# Altium PCB PCB.PcbDoc
Units mm, origin at the board's own origin, x right, y up, seen from the top; angles counter-clockwise.
Board outline 21 x 24 mm, 2 copper layers (Top Layer, Bottom Layer), stack 0.96 mm thick; 11 components, 7 nets, 26 pads, 24 vias.
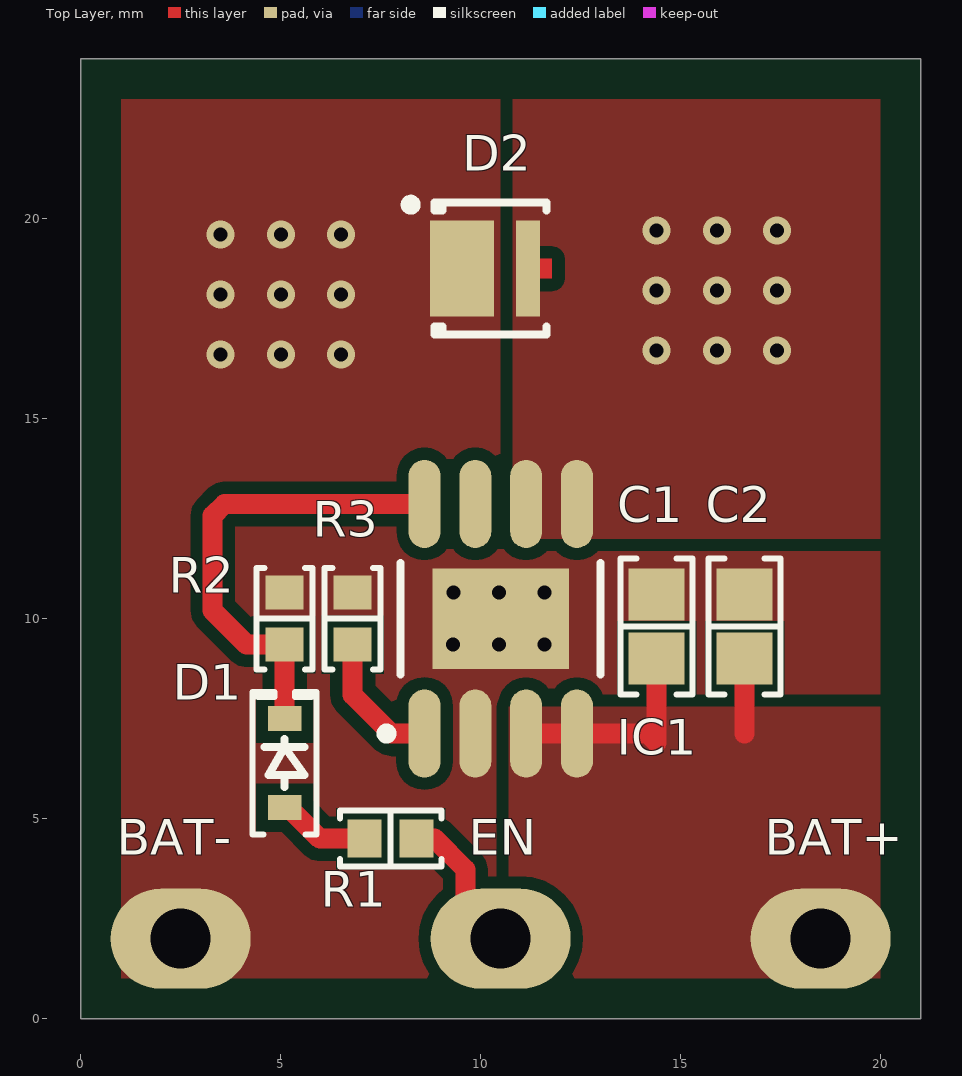
[diagram p0: Top Layer view]
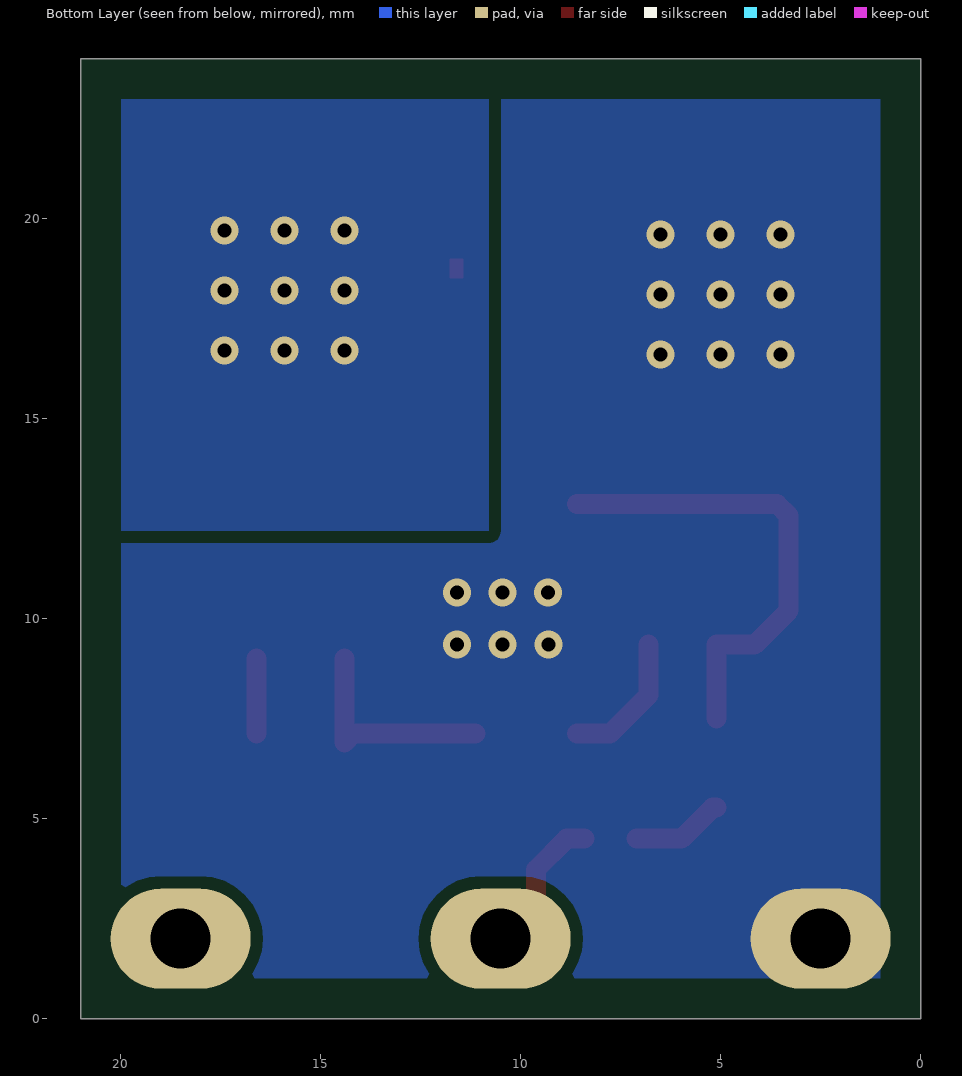
[diagram p1: Bottom Layer view, seen from below]
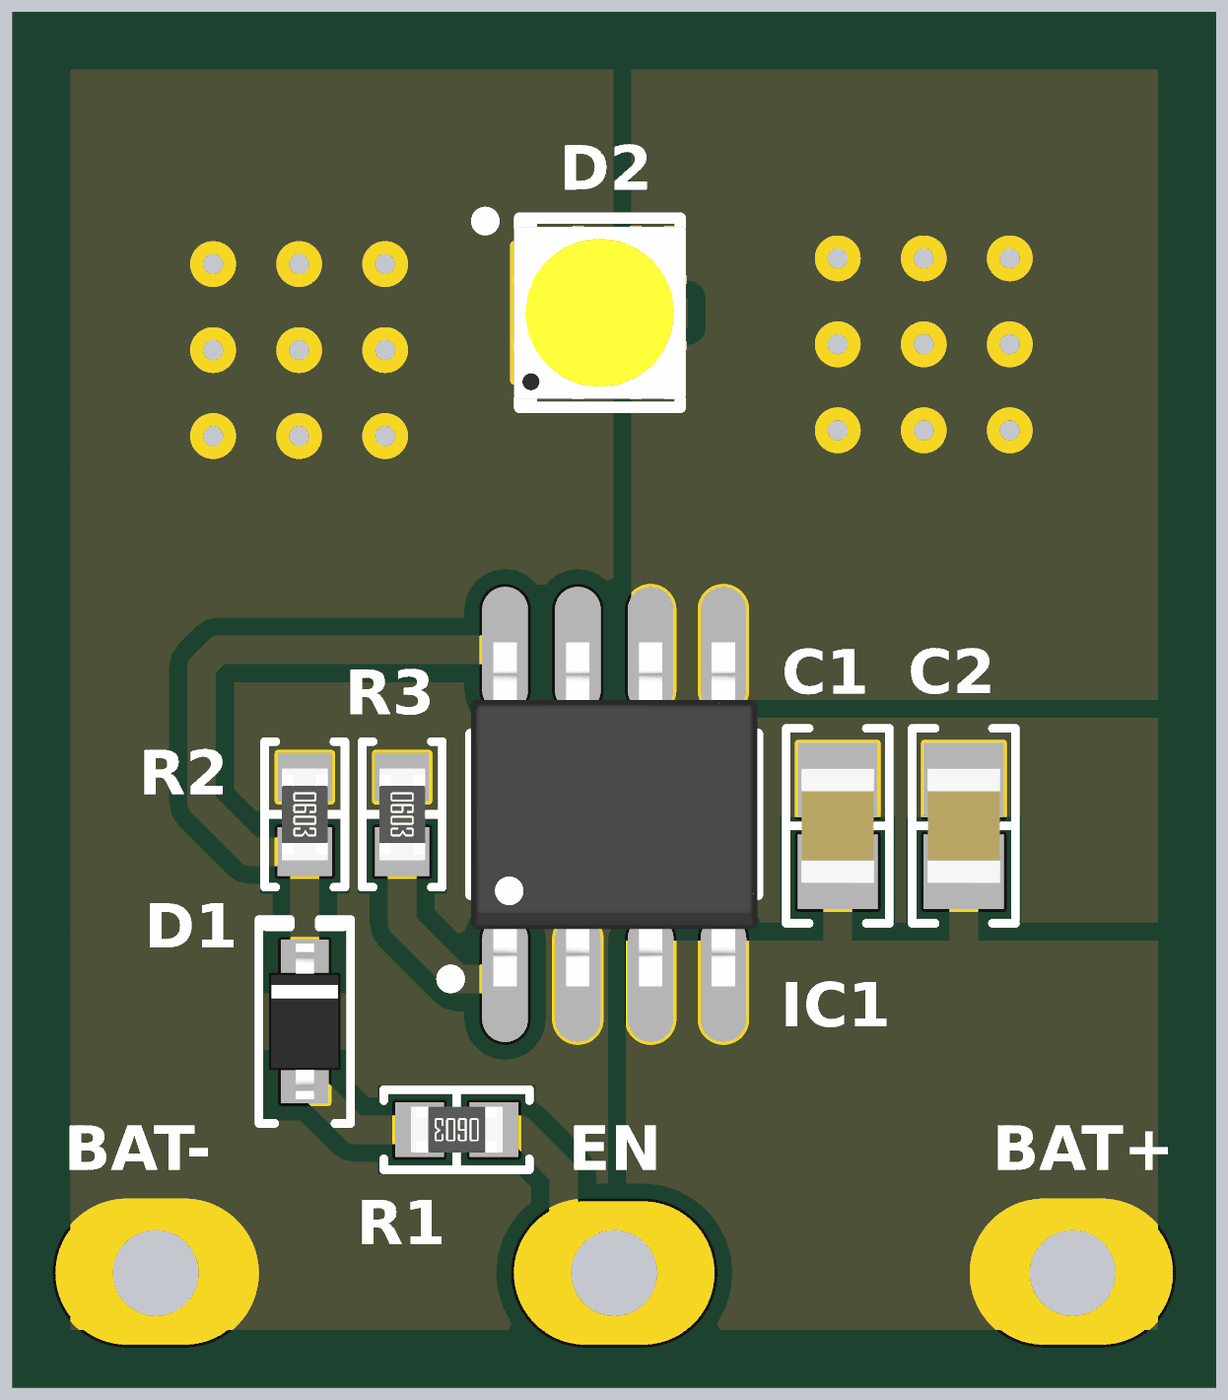
[diagram p2: 3D render of the assembled board from above, using the file's embedded part models]

## Layer stack, top to bottom
Top Solder: solder mask 0.02, Solder Resist, Dk 3.5
Top Layer: signal copper 0.03
Dielectric 1: dielectric 0.9, FR-4, Dk 4.8
Bottom Layer: signal copper 0.03
Bottom Solder: solder mask 0.02, Solder Resist, Dk 3.5

## Board outline
0,0 0,24 21,24 21,0

## Design rules (kind name [scope] priority, off if disabled: settings)
AcuteAngle [All] p1: minimum=6.00000000000000E+0001 checktracksonly=TRUE
AssemblyTestPointUsage [(not InNetClass('NOTESTPOINTS'))] p1: allowmultiple=TRUE
AssemblyTestPointUsage AssemblyTestPointUsageN [InNetClass('NOTESTPOINTS')] p2: valid=2 allowmultiple=TRUE
AssemblyTestpoint [All] p1: testpointundercomponent=TRUE minsize=0.8 maxsize=2 preferedsize=1 minholesize=0 maxholesize=0.35 preferedholesize=0 testpointgrid=1.27 usegrid=FALSE gridoriginx=87.5 gridoriginy=62.5 gridtolerance=0 allowsidetop=TRUE minspacing=2.54 // Zollner
BoardOutlineClearance BoardCopperOutlineClearance [(OnLayer('Top Layer') OR OnLayer('Bottom Layer') )] p1: gap=0.5 ignorepadtopadclearanceinfootprint=FALSE except(1: Poly-OutlineEdge Region-OutlineEdge; 1.5: SMDPad-OutlineEdge THPad-OutlineEdge)
Clearance PadToViaClearance [IsVia and not IsComponentVia vs IsPad] p1: gap=0.025 ignorepadtopadclearanceinfootprint=TRUE
Clearance "Clearance NOTSELV-SELV" [InNetClass('NOTSELV') vs NOT InNetClass('NOTSELV')] p2: gap=6 ignorepadtopadclearanceinfootprint=FALSE // according to previous calio PCB
Clearance "Clearance (FAB)" [All] p3: gap=0.203 ignorepadtopadclearanceinfootprint=TRUE except(0.305: Arc-Poly Track-Poly SMDPad-Poly THPad-Poly Via-Poly Fill-Poly Poly-Poly)
ComponentClearance ComponentClearance_NetTie [((ObjectKind = 'Component') And (ComponentType = 'Net Tie')) Or (Footprint = 'StarPoint') Or (Footprint like 'NetTieVia*')] p1: gap=-3.81 collisioncheckmode=3 verticalgap=-3.81 showdistances=FALSE
ComponentClearance [All] p2: gap=0.254 collisioncheckmode=3 verticalgap=0.254 showdistances=FALSE
DiffPairsRouting [All] p1: maxlimit=1.27 minlimit=0.203 mostfreqgap=0.203 toplayer_minwidth=0.152 toplayer_maxwidth=2.54 toplayer_prefwidth=0.254 bottomlayer_minwidth=0.152 bottomlayer_maxwidth=2.54 bottomlayer_prefwidth=0.254 maxuncoupledlength=12.7
FabricationTestPointUsage [All] p1: valid=2 allowmultiple=FALSE
FabricationTestpoint [All] p1: side=3 testpointundercomponent=TRUE minsize=1.016 maxsize=2.54 preferedsize=1.524 minholesize=0 maxholesize=1.016 preferedholesize=0.813 testpointgrid=0.025 allowsidetop=TRUE allowsidebottom=TRUE usegrid=FALSE gridtolerance=0
HoleSize [All] p1: absolutevalues=TRUE maxlimit=6.35 minlimit=0.3 maxpercent=80.000 minpercent=20.000 // Zollner
HoleToHoleClearance HoleToHoleClearance_NetTieVia [InPadClass('NetTieVias') vs InPadClass('NetTieVias')] p1: gap=0 allowstackedmicrovias=TRUE
HoleToHoleClearance [All] p2: gap=0.25 allowstackedmicrovias=TRUE // Zollner
MinimumAnnularRing [All] p1: minimumring=0.15 // PCBWAY
MinimumSolderMaskSliver [All] p1: minsoldermaskwidth=0.2 // Zollner
PlaneClearance PlaneClearance_1 [All] p1: clearance=0.508
PlaneConnect [All] p1: pad.planeconnectstyle=Relief pad.reliefexpansion=0.508 pad.reliefentries=4 pad.reliefconductorwidth=0.254 pad.reliefairgap=0.254 via.planeconnectstyle=Direct via.reliefexpansion=0.508 via.reliefentries=4 via.reliefconductorwidth=0.254 via.reliefairgap=0.254
PolygonConnect [All] p1: connectstyle=Direct reliefconductorwidth=0.254 reliefentries=4 polygonreliefangle="90 Angle" airgapwidth=0.254
RoutingVias [All] p1: holewidth=0.35 width=0.7 viastyle="Through Hole" minholewidth=0.3 minwidth=0.6 maxholewidth=1.27 maxwidth=1.27
SMDEntry [not IsTestpoint] p1: side=TRUE corner=TRUE anyangle=FALSE
SMDNeckDown [not IsTestpoint] p1: percent=90.000
SMDToCorner [All] p1: distance=10000
SMDToPlane [All] p1: distance=0
ShortCircuit [All vs not IsBoardCutoutRegion] p1: allowed=FALSE
SilkToSolderMaskClearance [IsPad] p1: minsilkscreentomaskgap=0.127 clearancetoexposedcopper=TRUE
SolderMaskExpansion [All] p1: expansion=0.05 // Zollner
SolderMaskExpansion SolderMaskExpansionToHoles [All] p2: expansion=0.1 soldermaskfromhole=TRUE // Zollner
UnRoutedNet [All] p1: checkbadconnections=TRUE
ViasUnderSMD HeatSinkVia [not InComponentClass('Heat Sink')] p1: allowed=FALSE
Width [All] p1: maxlimit=12.7 minlimit=0.203 preferedwidth=0.254
16 further rules are at their usual default settings.

## Classes and differential pairs
component class "Heat Sink": IC1

## Components (designator, comment, footprint, x,y, rotation, side; value= is the part's Value field where it differs from the comment)
BAT+ "2.5MMx3.5MM" PAD_WITH_HOLE_2.5X3.5MM 18.5,2 r90 top locked (schematic designator J1)
BAT- "2.5MMx3.5MM" PAD_WITH_HOLE_2.5X3.5MM 2.5,2 r90 top locked (schematic designator J3)
C1 "10µF" "CAP 0805_2012" 14.4,9.8 r270 top
C2 "10µF" "CAP 0805_2012" 16.6,9.8 r270 top
D1 "1N4148WS-HG3-08" SOD323 5.1,6.388 r90 top
D2 "MP-3030-1100-56-95" "LUMINUS MP-3030-110" 10.25,18.75 r0 top
EN "2.5MMx3.5MM" PAD_WITH_HOLE_2.5X3.5MM 10.5,2 r90 top locked (schematic designator J2)
IC1 "CN5711" "ALPHAOMEGA SO8 SOP-8L" 10.5,10 r90 top
R1 "5.1 kOhms" "RES 0603_1608" 7.75,4.5 r180 top
R2 "20 kOhms" "RES 0603_1608" 5.1,10 r270 top
R3 "9.1 kOhms" "RES 0603_1608" 6.8,10 r270 top

## Footprints (in the part's own frame and the unit in brackets; to place one, negate y for a bottom-side part, rotate by r counter-clockwise, add the part's x,y. Pads: shape width x height; smd on the part's side, far side on the other; paste and mask are expansions set on the pad)
"ALPHAOMEGA SO8 SOP-8L" [mm] "SOIC, 8-Leads, Body 4.90x3.90mm, Pitch 1.27mm, IPC Medium Density"
  oval 2.2x0.8 smd: 1(-2.87,1.905) 2(-2.87,0.635) 3(-2.87,-0.635) 4(-2.87,-1.905) 5(2.87,-1.905) 6(2.87,-0.635) 7(2.87,0.635) 8(2.87,1.905)
  rect 2.513x3.402 smd: 6(0,0)
  silkscreen extent -2.99,-2.5 1.4,2.98, body extent -3,-2.5 3,2.5, height 1.75
"CAP 0805_2012" [mm] "Chip Capacitor, 2-Leads, Body 2.00x1.20mm, IPC Medium Density"
  rect 1.3x1.4 smd: 1(-0.8,0) 2(0.8,0)
  silkscreen extent -1.7,-0.9 1.7,0.9, body extent -1,-0.64 1,0.64, height 1.26
"LUMINUS MP-3030-110" [mm]
  rect 0.6x2.4 smd paste-0.2: 1(0.935,0)
  rect 1.6x2.4 smd paste-0.25: 2(-0.715,0)
  Top Layer region: 1.185,-0.25 1.535,-0.25 1.535,0.25 1.185,0.25
  silkscreen extent -2.12,-1.65 1.4,1.72, body extent -1.51,-1.51 1.51,1.51, height 0.53
PAD_WITH_HOLE_2.5X3.5MM [mm]
  rrect100% 2.5x3.5 hole 1.5: 1(0,0)
"RES 0603_1608" [mm] "Chip Resistor, 2-Leads, Body 1.60x0.80mm, IPC Medium Density"
  rect 0.85x0.95 smd: 1(-0.65,0) 2(0.65,0)
  silkscreen extent -1.27,-0.7 1.27,0.7, body extent -0.8,-0.4 0.8,0.4, height 0.45
SOD323 [mm] "SOD, 2-Leads, Body 1.25x2.50mm, IPC Medium Density"
  rect 0.625x0.83 smd: 1(-1.112,0) 2(1.112,0)
  silkscreen extent -1.78,-0.8 1.78,0.8, body extent -1.36,-0.62 1.36,0.62, height 1.05

## Part data
BAT+ BAT- EN: library part PAD_WITH_HOLE_2.5X3.5MM, "High: 3mm Length: 3.5mm"
C1 C2: library part 08056D106KAT2A, "CAP CER 10UF 6.3V X5R 0805", Device Package="0805 (2012 Metric)", manufacturer="AVX Corporation", Operating Temperature="-55°C ~ 85°C", Supplier Part Number 1=478-1417-1-ND, Temperature Coefficient=X5R, Tolerance=±10%, Voltage - Rated=6.3V, Applications="General Purpose", Capacitance=10µF, componentlink1description=Datasheet, componentlink1url=http://datasheets.avx.com/cx5r.pdf, componentlink2description="DigiKey Link", componentlink2url=http://digikey.com/product-detail/en/avx-corporation/08056D106KAT2A/478-1417-1-ND/564449, id=127, lastupdated=2020-09-02T01:04:40.460, Lifecycle Status=Active, Minimum Order=1, Mounting Type="Surface Mount, MLCC", Package / Case="0805 (2012 Metric)", packaging=TapeAndReel, partid=3135, Part Number=08056D106KAT2A, Part Status=Active, price=0.04, series=-, Size / Dimension="0.079\" L x 0.049\" W (2.01mm x 1.25mm)", Supplier 1=DigiKey, Thickness (Max)="0.055\" (1.40mm)"
D1: "SWITCHING DIODE GENPURP SOD323-H", Current - Average Rectified (Io)=150mA, Current - Reverse Leakage @ Vr="100µA @ 100V", manufacturer="Vishay Semiconductor Diodes Division", Operating Temperature - Junction="-55°C ~ 150°C", Package / Case="SC-76, SOD-323", Supplier Device Package=SOD-323, Supplier Part Number 1=1N4148WS-HG3-08GICT-ND, Voltage - DC Reverse (Vr) (Max)=100V, Voltage - Forward (Vf) (Max) @ If="1.2V @ 100mA", componentlink1description=Datasheet, componentlink1url=http://www.vishay.com/docs/85413/1n4148wsg.pdf, componentlink2description="DigiKey Link", componentlink2url=http://digikey.com/product-detail/en/vishay-semiconductor-diodes-division/1N4148WS-HG3-08/1N4148WS-HG3-08GICT-ND/9467498, Diode Type=Standard, id=2893, lastupdated=2023-01-02T21:07:51.313, Lifecycle Status=Active, Minimum Order=1, Mounting Type="Surface Mount", packaging=TapeAndReel, partid=2893, Part Number=1N4148WS-HG3-08, Part Status=Active, price=0.06, Reverse Recovery Time (Trr)=4ns, series="Automotive, AEC-Q101", Speed="Small Signal =< 200mA (Io), Any Speed", Supplier 1=DigiKey
D2: "LED MID PWR 5600K 95CRI 3030", Color="White, Cool", Cri (Color Rendering Index)=95, Current - Max=240mA, Current - Test=150mA, Device Package="1212 (3030 Metric)", Flux @ 25°C, Current - Test="60lm (Typ)", Lumens/Watt @ Current - Test="133 lm/W", manufacturer="Luminus Devices Inc.", Supplier Device Package=3030, Supplier Part Number 1=1214-1348-1-ND, Voltage - Forward (Vf) (Typ)=3V, Cct (K)=5600K, componentlink1description=Datasheet, componentlink1url=https://download.luminus.com/datasheets/Luminus_MP3030_1100_Datasheet.pdf, componentlink2description="DigiKey Link", componentlink2url=https://www.digikey.com/en/products/detail/luminus-devices-inc/MP-3030-1100-56-95/5731697, Height - Seated (Max)="0.020\" (0.52mm)", id=1, lastupdated=2023-01-02T21:00:00.490, Lifecycle Status=Active, Minimum Order=1, Mounting Type="Surface Mount", Package / Case="1212 (3030 Metric)", packaging=TapeAndReel, partid=1, Part Number=MP-3030-1100-56-95, Part Status=Active, price=0.05, series=MP-3030, Size / Dimension="0.118\" L x 0.118\" W (3.00mm x 3.00mm)", Supplier 1=DigiKey, Viewing Angle=110°
IC1: library part "IC CN5711 8SOP", "Current regulation integrated circuit / operating from an input voltage of 2.8V to 6V, the / constant output current can be set up to 1.5A"
R1: library part TNPW06035K10BYEN, "RES 5.1K OHM 0.1% 1/10W 0603", Device Package="0603 (1608 Metric)", manufacturer="Vishay Dale", Operating Temperature="-55°C ~ 155°C", Power (Watts)="0.125W, 1/8W", Ratings=AEC-Q200, Supplier Device Package=0603, Supplier Part Number 1=541-9831-1-ND, Temperature Coefficient=±10ppm/°C, Tolerance=±0.1%, componentlink1description=Datasheet, componentlink1url=http://www.vishay.com/docs/28758/tnpw_e3.pdf, componentlink2description="DigiKey Link", componentlink2url=http://digikey.com/product-detail/en/vishay-dale/TNPW06035K10BYEN/541-9831-1-ND/9562456, Composition="Thin Film", Features="Anti-Sulfur, Automotive AEC-Q200, Moisture Resistant", Height - Seated (Max)="0.022\" (0.55mm)", id=199, lastupdated=2023-01-02T20:30:25.390, Lifecycle Status=Active, Minimum Order=1, Number of Terminations=2, Package / Case="0603 (1608 Metric)", packaging=TapeAndReel, partid=5273, Part Number=TNPW06035K10BYEN, Part Status=Active, price=0.27, Resistance="5.1 kOhms", series="TNPW e3", Size / Dimension="0.061\" L x 0.033\" W (1.55mm x 0.85mm)", Supplier 1=DigiKey
R2: library part TNPW060320K0FHEA, "RES 20K OHM 1% 1/10W 0603", Device Package="0603 (1608 Metric)", manufacturer="Vishay Dale", Operating Temperature="-55°C ~ 155°C", Power (Watts)="0.1W, 1/10W", Ratings=AEC-Q200, Supplier Device Package=0603, Supplier Part Number 1=TNPW060320K0FHEA-ND, Temperature Coefficient=±50ppm/°C, Tolerance=±1%, componentlink1description=Datasheet, componentlink1url=https://www.vishay.com/docs/28758/tnpw_e3.pdf, componentlink2description="DigiKey Link", componentlink2url=https://www.digikey.com/en/products/detail/vishay-dale/TNPW060320K0FHEA/7661035, Composition="Thin Film", Features="Anti-Sulfur, Automotive AEC-Q200, Moisture Resistant", Height - Seated (Max)="0.022\" (0.55mm)", id=20540, lastupdated=2023-08-15T19:32:03.793, Lifecycle Status=Active, Minimum Order=5000, Number of Terminations=2, Package / Case="0603 (1608 Metric)", packaging=TapeAndReel, partid=79897, Part Number=TNPW060320K0FHEA, price=0.05, Resistance="20 kOhms", series="TNPW e3", Size / Dimension="0.061\" L x 0.033\" W (1.55mm x 0.85mm)", Supplier 1=DigiKey
R3: library part CRCW06039K10FKEAC, "RES 9.1K OHM 1% 1/10W 0603", Device Package="0603 (1608 Metric)", manufacturer="Vishay Dale", Operating Temperature="-55°C ~ 155°C", Power (Watts)="0.1W, 1/10W", Supplier Device Package=0603, Supplier Part Number 1=541-5604-1-ND, Temperature Coefficient=±100ppm/°C, Tolerance=±1%, componentlink1description=Datasheet, componentlink1url=https://www.vishay.com/docs/28773/crcwce3.pdf, componentlink2description="DigiKey Link", componentlink2url=https://www.digikey.com/en/products/detail/vishay-dale/CRCW06039K10FKEAC/7924351, Composition="Thick Film", Height - Seated (Max)="0.022\" (0.55mm)", id=15508, lastupdated=2023-01-02T20:28:21.993, Lifecycle Status=Active, Minimum Order=1, Number of Terminations=2, Package / Case="0603 (1608 Metric)", packaging=CutTape, partid=64048, Part Number=CRCW06039K10FKEAC, Part Status=Active, price=0.01, Resistance="9.1 kOhms", series=CRCW-C, Size / Dimension="0.063\" L x 0.031\" W (1.60mm x 0.80mm)", Supplier 1=DigiKey

## Via types
v1: diameter 0.7, hole 0.35, Top Layer to Bottom Layer, 24 vias

## Nets (pads, with @x,y where several pads share a name; then routed paths per layer and width w, separated by ;. In a path a pad name is that pad's centre, name@x,y a point inside that pad or via, vN(x,y) a via of type N, cw(c..) or ccw(c..) an arc to the next point about the centre after c; other vN are vias at no path point)
BAT+: BAT+.1 C1.2 C2.2 IC1.3 IC1.4 | length 7.3
  Top Layer w0.5: IC1.3 IC1.4 14.179,7.13 14.4,6.909 C1.2 ; 16.6,7.13 C2.2
ENABLE_LIGHT: D1.2 IC1.8 R2.2 | length 11.8
  Top Layer w0.5: D1.2 R2.2 4.15,9.35 3.3,10.2 3.3,12.577 3.593,12.87 IC1.8
GND: BAT-.1 C1.1 C2.1 D2.2 IC1.2 IC1.6@10.5,10 R2.1 R3.1
  other v1: 9.31,9.35 10.46,9.35 11.598,9.35 9.315,10.65 10.46,10.65 11.598,10.65 3.5,16.6 5.001,16.6 6.502,16.6 3.5,18.1 5.001,18.1 6.502,18.1 3.5,19.6 5.001,19.6 6.502,19.6
NetD1_1: D1.1 R1.2 | length 2.3
  Top Layer w0.5: D1.1 5.202,5.275 5.977,4.5 R1.2
NetD2_1: D2.1 IC1.5 IC1.6@11.135,12.87
  other v1: 14.4,16.7 15.901,16.7 17.402,16.7 14.4,18.2 15.901,18.2 17.402,18.2 14.4,19.7 15.901,19.7 17.402,19.7
NetIC1_1: IC1.1 R3.2 | length 3.5
  Top Layer w0.5: R3.2 6.8,8.093 7.763,7.13 IC1.1
NetJ2_1: EN.1 R1.1 | length 4.1
  Top Layer w0.5: R1.1 8.85,4.5 9.617,3.733 9.617,2.883 EN.1 EN.1@10,2
pads on no net: IC1.7

## Polygon pours and split planes (outlines as drawn)
GND on Bottom Layer "GND_L02_P022" (solid, remove dead copper, pour order 22): 0,0 0,24.1 0.1,24 21,24 21,0
NetD2_1 on Bottom Layer "NETD2_1_L02_P014" (solid, remove dead copper, pour order 14): 10.8,23.1 10.8,12.2 20.5,12.2 20.5,23.1
GND on Top Layer "GND_L01_P026" (solid, remove dead copper, pour order 26): 0.1,24.1 0,24 0,0.025 20.975,0.025 21,0 21,24 0.1,24 0,24.1
BAT+ on Top Layer "BAT+_L01_P024" (solid, remove dead copper, pour order 24): 10.7,7.8 21,7.8 21,0 10.7,0.05
NetD2_1 on Top Layer "NETD2_1_L01_P016" (solid, remove dead copper, pour order 16): 10.8,23.1 10.8,12 20.1,12 20.1,23.1

## Silkscreen, mask and mechanical layers (free items; w line width, h text height)
Board outline:
  the board outline again, w0.2

## Dimensions
21,24 to 21,0 on Board outline
0,0 to 21,0 on Board outline